# Altium PCB ESP32SSMB V1.4 .PcbDoc (part 2 of 2)
Units mm, origin at the board's own origin, x right, y up, seen from the top; angles counter-clockwise.
Board outline 43.94 x 35.18 mm, 2 copper layers (Top Layer, Bottom Layer), stack 1.671 mm thick; 77 components, 65 nets, 278 pads, 383 vias.
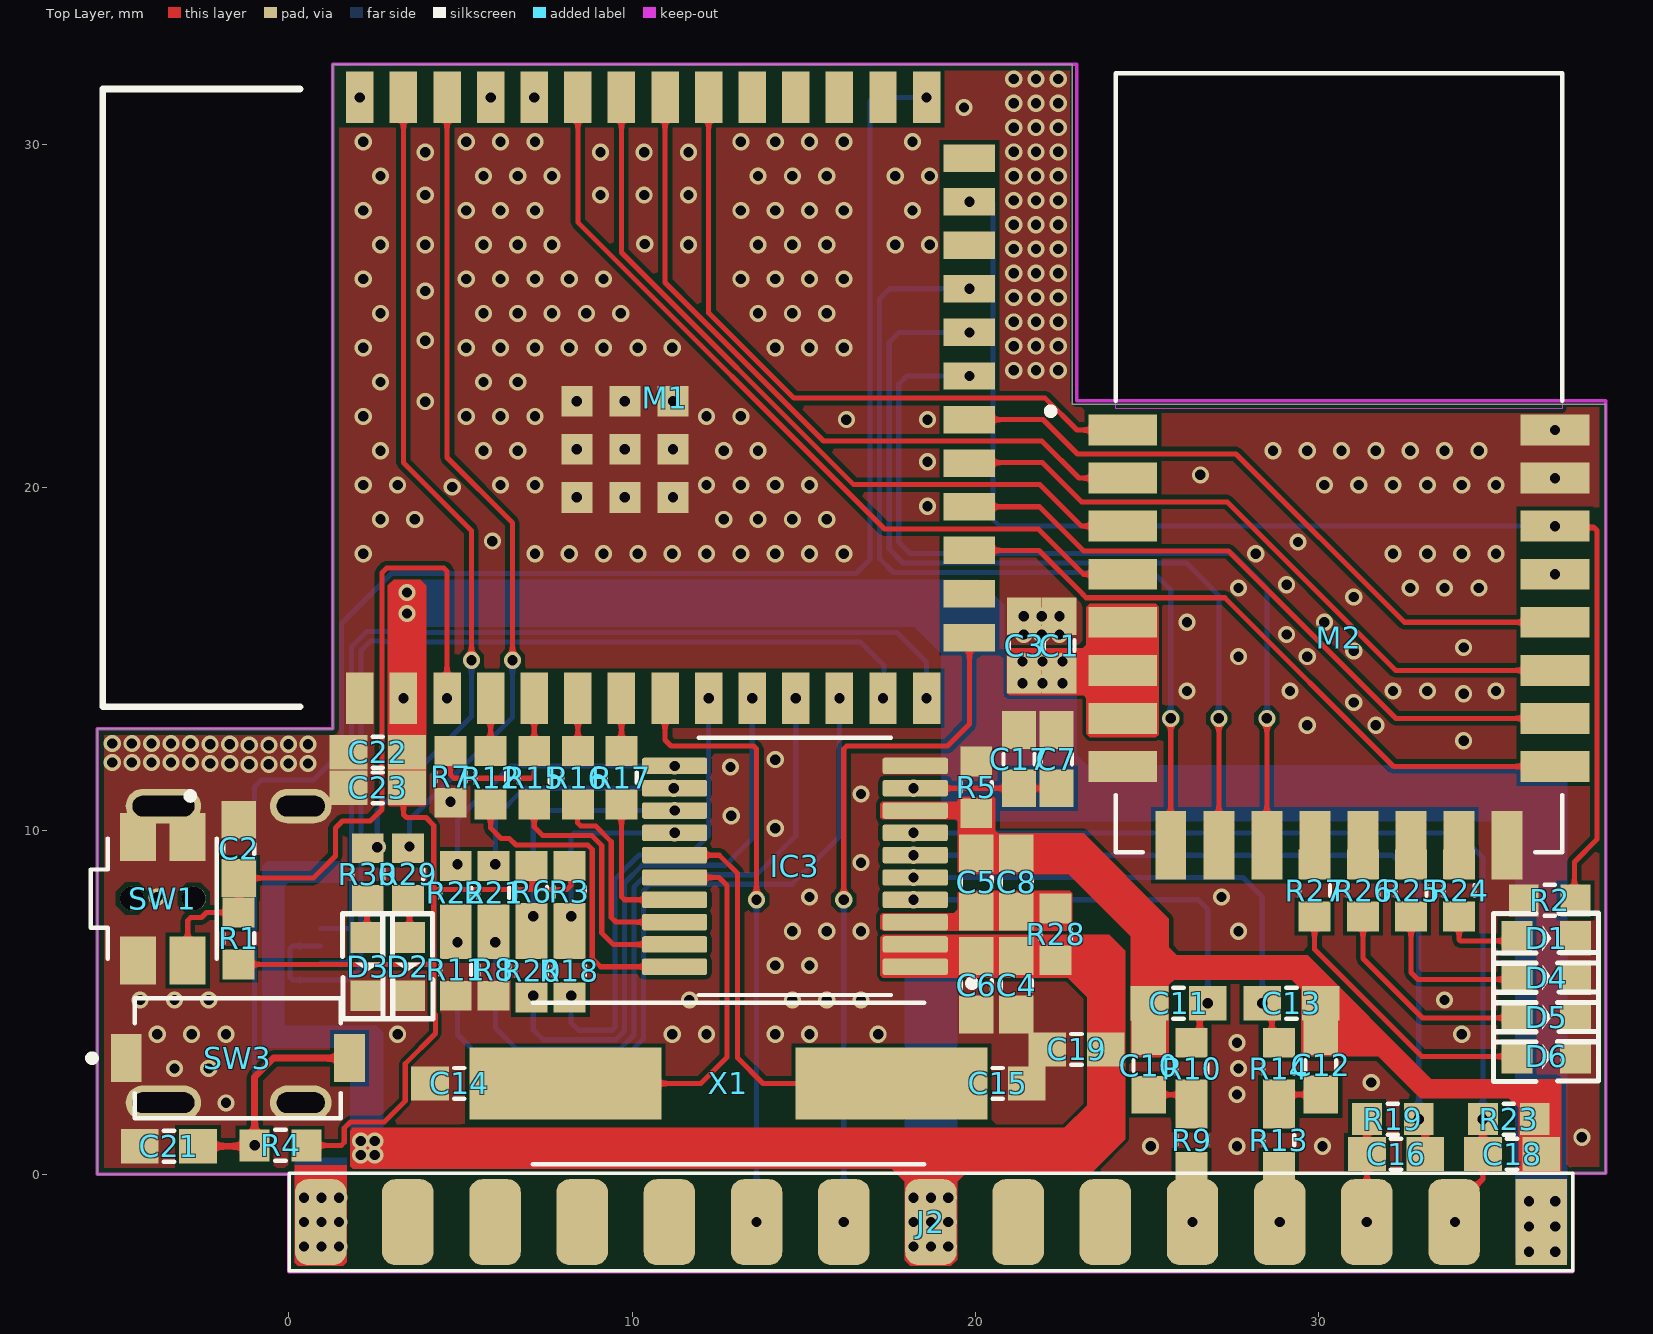
[diagram p0: Top Layer view]

## Via types
v1: diameter 0.5, hole 0.3, Top Layer to Bottom Layer, tented both sides, 383 vias

## Nets (pads, with @x,y where several pads share a name; then routed paths per layer and width w, separated by ;. In a path a pad name is that pad's centre, name@x,y a point inside that pad or via, vN(x,y) a via of type N, cw(c..) or ccw(c..) an arc to the next point about the centre after c; other vN are vias at no path point) (continued)
ADE-CF: (continued)
  Bottom Layer w0.15: v1(4.916,6.756) 4.916,4.064 5.62,3.36 9.756,3.36 10.338,3.942 10.338,8.255 10.526,8.443 14.654,8.443 16.041,9.83 v1(16.041,13.866)
ADE-I\Q\R\: IC3.14 R3.2 R18.1 | length 6.3
  Top Layer w0.15: R18.1 8.199,6.705 8.225,6.705 8.225,7.465 v1(8.225,7.516)
  Bottom Layer w0.15: v1(8.225,7.516) 8.225,9.853 8.313,9.941 v1(11.241,9.941)
ADE-MISO: M1.5 R7.2 R15.2 | length 5.5
  Top Layer w0.15: R7.2 4.712,11.633 4.814,11.532 7.06,11.532 7.148,11.619 7.148,12.327 R15.2 M1.5
ADE-MOSI: M1.4 R12.2 | length 1.5
  Top Layer w0.15: R12.2 M1.4
ADE-S\A\G\: IC3.13 R6.2 R20.1 | length 8
  Top Layer w0.15: R20.1 7.096,6.705 7.122,6.705 7.122,7.465 v1(7.122,7.516)
  Bottom Layer w0.15: v1(7.122,7.516) 7.122,10.503 7.21,10.591 v1(11.241,10.591)
ADE-SCLK: M1.6 R16.2 | length 1.5
  Top Layer w0.15: R16.2 M1.6
ADE-ZX: M1.11 R8.2 R21.2 | length 21.3
  Top Layer w0.15: R21.2 5.968,6.806 v1(6.019,6.756)
  Bottom Layer w0.15: v1(6.019,6.756) 6.019,4.256 6.638,3.637 9.641,3.637 10.061,4.057 10.061,7.532 10.061,8.37 10.411,8.72 11.249,8.72 13.636,8.72 14.771,9.855 v1(14.771,13.866)
AGND-ESP: C5.1 C8.1 C10.1 C11.1 C12.1 C13.1 C18.1 IC3.8 R5.1 R23.1
BOOT: C21.2 M1.27 R4.1 SW3.2 TP10.1 | length 55
  Top Layer w0.2: C21.2 -1.021,0.813 v1(-0.996,0.838) -0.996,2.826 -0.444,3.378 SW3.2
  Bottom Layer w0.15: v1(-0.996,0.838) -0.996,11.285 -0.799,11.481 0.717,11.481 1.535,12.299 1.535,16.044 2.989,17.498 16.521,17.498 16.937,17.914 16.937,31.278 17.025,31.366 v1(18.581,31.366)
CLK-IN: C15.1 IC3.15 X1.2 | length 12.2
  Top Layer w0.15: IC3.15 12.541,9.291 13.069,8.763 13.069,3.39 13.818,2.642 X1.2
CLK-OUT: C14.2 IC3.16 X1.1 | length 11.6
  Top Layer w0.15: X1.1 12.002,2.642 12.764,3.404 12.764,8.407 12.53,8.641 IC3.16
CUR-SHT-N-ESP: J2.07 J2.08 R13.1
  other v1: 28.868,-1.397
CUR-SHT-P-ESP: J2.09 J2.10 R9.1
  other v1: 26.328,-1.397
DN: J3.A7 J3.B7 M1.13 | length 29.8
  Bottom Layer w0.15: J3.A7 0.124,6.651 0.036,6.563 0.036,5.74 0.126,5.651 J3.B7 1.729,5.651 2.106,6.028 2.106,15.25 2.382,15.526 2.822,15.526 2.849,15.499 16.645,15.499 17.336,14.808 17.336,13.892 v1(17.311,13.866)
DP: J3.A6 J3.B6 M1.14 | length 29.2
  Bottom Layer w0.15: J3.B6 1.775,7.151 ; J3.A6@0.928,6.147 J3.A6 1.668,6.151 1.829,6.311 1.829,15.364 2.268,15.803 2.937,15.803 2.964,15.776 17.715,15.776 18.581,14.91 v1(18.581,13.866)
DWM3000-EXTON: M1.32 M2.1 | length 19.8
  Top Layer w0.15: M1.32 12.231,25.095 14.72,22.606 19.008,22.606 ; 19.008,22.606 20.653,22.606 22.035,22.606 22.965,21.676 M2.1
DWM3000-IO4: M1.21 M2.11 | length 25.5
  Top Layer w0.15: M2.11 v1(28.495,13.276)
  Bottom Layer w0.15: v1(19.831,23.251) 18.007,23.251 17.768,23.012 17.768,18.415 18.103,18.08 27.476,18.08 28.495,17.061 v1(28.495,13.276)
DWM3000-IO5: M1.22 M2.10 | length 25.9
  Top Layer w0.15: M2.10 v1(27.095,13.276)
  Bottom Layer w0.15: v1(19.831,24.521) 17.778,24.521 17.491,24.234 17.491,18.209 17.897,17.803 26.152,17.803 27.095,16.86 v1(27.095,13.276)
DWM3000-IO6: M1.23 M2.9 | length 26.6
  Top Layer w0.15: M2.9@25.693,9.584 v1@25.693,13.276
  Bottom Layer w0.15: v1(19.831,25.791) 17.499,25.791 17.214,25.506 17.214,17.928 17.616,17.526 25.185,17.526 25.695,17.016 v1(25.695,13.276)
DWM3000-IQR: M1.25 M2.22 R2.2 | length 38.7
  Top Layer w0.15: v1(36.89,18.876) 36.93,18.836 38.027,18.836 38.115,18.748 38.115,9.756 37.453,9.093 37.453,8.009 R2.2
  Bottom Layer w0.15: v1(19.831,28.331) 19.871,28.372 20.423,28.372 20.511,28.284 20.511,19.075 20.71,18.876 v1(36.89,18.876)
DWM3000-RSTn: M1.34 M2.3 | length 22.4
  Top Layer w0.15: M1.34 9.691,26.852 16.456,20.086 21.888,20.086 23.098,18.876 M2.3
DWM3000-SPI-CLK: M1.20 M2.20 | length 19.5
  Top Layer w0.15: M1.20 21.974,21.981 22.975,20.98 27.598,20.98 32.502,16.076 M2.20
DWM3000-SPI-CS: M1.17 M2.17 | length 19.7
  Top Layer w0.15: M1.17 21.856,18.171 23.144,16.883 23.144,16.877 23.232,16.789 27.268,16.789 32.181,11.876 M2.17
DWM3000-SPI-MISO: M1.19 M2.19 | length 19.6
  Top Layer w0.15: M1.19 19.846,20.726 21.959,20.726 23.102,19.583 27.338,19.583 32.245,14.676 M2.19
DWM3000-SPI-MOSI: M1.18 M2.18 | length 19.6
  Top Layer w0.15: M1.18 21.873,19.441 23.162,18.151 27.379,18.151 32.254,13.276 M2.18
DWM3000-SYNC: M1.35 M2.4 | length 23.8
  Top Layer w0.15: M1.35 8.421,27.73 17.355,18.796 19.008,18.796 ; 19.008,18.796 20.653,18.796 21.832,18.796 23.152,17.476 M2.4
DWM3000-WAKEUP: M1.33 M2.2 | length 21.1
  Top Layer w0.15: M1.33 10.961,25.973 15.578,21.356 21.939,21.356 23.019,20.276 M2.2
ESP-I\Q\R\: M1.9 R18.2 | length 13.8
  Bottom Layer w0.15: v1(8.225,5.196) 8.225,4.412 8.446,4.191 9.412,4.191 9.5,4.279 9.5,8.592 10.204,9.296 11.672,9.296 12.231,9.855 v1(12.231,13.866)
ESP-S\A\G\: M1.10 R20.2 | length 16.5
  Bottom Layer w0.15: v1(7.122,5.196) 7.122,4.203 7.41,3.914 9.526,3.914 9.784,4.171 9.784,7.646 9.784,8.484 10.297,8.997 11.135,8.997 12.719,8.997 13.501,9.779 v1(13.501,13.866)
GND-ESP: C1.1 C2.1 C3.1 C4.1 C6.1 C7.1 C14.1 C15.2 C17.1 C19.1 C21.1 C22.1 C23.1 D1.2 D2.2 D3.2 D4.2 D5.2 D6.2 IC1.1 IC3.10 J2.29 J2.30 J3.A1B12 J3.B1A12 J3.SHIELD M1.1 M1.40 M1.41 M1.42 M1.43 M1.44 M1.45 M1.46 M1.47 M1.48 M1.49 M2.8 M2.16 M2.21 M2.23 M2.24 R2.1 R5.2 R7.1 R8.1 R11.1 SW1.11 SW1.21 SW1.22 SW3.1 TP1.1
  other v1: 0.445,-2.108 0.953,-2.108 1.461,-2.108 0.445,-1.397 0.953,-1.397 1.461,-1.397 0.445,-0.686 0.953,-0.686 1.461,-0.686 25.109,0.813 27.623,0.813 30.112,0.813 37.67,1.075 -1.83,2.075 27.623,2.318 31.535,2.667 -3.33,3.075 -2.33,3.075 27.67,3.075 27.623,3.828 -3.83,4.075 -2.83,4.075 -1.83,4.075 3.17,4.075 11.17,4.075 12.17,4.075 14.17,4.075 15.17,4.075 17.17,4.075 34.17,4.075 -4.33,5.075 -3.33,5.075 -2.33,5.075 11.67,5.075 14.67,5.075 15.67,5.075 16.67,5.075 33.67,5.075 14.17,6.075 15.17,6.075 14.67,7.075 15.67,7.075 16.67,7.075 27.67,7.075 -3.83,8.075 15.17,8.075 27.17,8.075 16.67,9.075 14.17,10.075 12.891,10.439 4.712,10.846 16.67,11.075 12.866,11.862 -1.15,11.938 -0.58,11.938 -2.291,11.963 -1.721,11.963 -0.01,11.963 0.561,11.963 -5.143,11.989 -4.572,11.989 -4.002,11.989 -3.432,11.989 -2.861,11.989 14.17,12.075 -1.15,12.497 -0.58,12.497 -2.291,12.522 -1.721,12.522 -0.01,12.522 0.561,12.522 -5.143,12.548 -4.572,12.548 -4.002,12.548 -3.432,12.548 -2.861,12.548 34.227,12.624 29.67,13.075 31.67,13.075 31.027,13.741 34.227,13.995 26.17,14.075 29.17,14.075 32.17,14.075 33.17,14.075 35.17,14.075 27.67,15.075 29.67,15.075 31.027,15.24 34.227,15.342 21.413,15.723 21.934,15.723 22.454,15.723 29.071,15.723 26.17,16.075 30.17,16.075 21.413,16.256 21.934,16.256 22.454,16.256 31.027,16.815 27.67,17.075 32.67,17.075 33.67,17.075 34.67,17.075 29.071,17.17 36.89,17.476 2.17,18.075 7.17,18.075 8.17,18.075 9.17,18.075 10.17,18.075 11.17,18.075 12.17,18.075 13.17,18.075 14.17,18.075 15.17,18.075 16.17,18.075 28.17,18.075 32.17,18.075 33.17,18.075 34.17,18.075 35.17,18.075 29.401,18.415 5.932,18.44 2.67,19.075 3.67,19.075 12.67,19.075 13.67,19.075 14.67,19.075 15.67,19.075 18.606,19.456 8.391,19.716 9.791,19.716 11.191,19.716 4.763,20.015 2.17,20.075 3.17,20.075 6.17,20.075 7.17,20.075 12.17,20.075 13.17,20.075 14.17,20.075 15.17,20.075 30.17,20.075 31.17,20.075 32.17,20.075 33.17,20.075 34.17,20.075 35.17,20.075 36.89,20.276 26.556,20.371 18.606,20.752 2.67,21.075 5.67,21.075 6.67,21.075 12.67,21.075 13.67,21.075 28.67,21.075 29.67,21.075 30.67,21.075 31.67,21.075 32.67,21.075 33.67,21.075 34.67,21.075 8.391,21.116 9.791,21.116 11.191,21.116 36.89,21.676 16.244,21.981 18.606,21.981 2.17,22.075 5.17,22.075 6.17,22.075 7.17,22.075 12.17,22.075 13.17,22.075 3.976,22.504 8.391,22.516 9.791,22.516 11.191,22.516 2.67,23.075 5.67,23.075 6.67,23.075 21.121,23.415 21.769,23.415 22.416,23.415 2.17,24.075 5.17,24.075 6.17,24.075 7.17,24.075 8.17,24.075 9.17,24.075 10.17,24.075 11.17,24.075 14.17,24.075 15.17,24.075 16.17,24.075 21.121,24.122 21.769,24.122 22.416,24.122 3.976,24.282 21.121,24.829 21.769,24.829 22.416,24.829 2.67,25.075 5.67,25.075 6.67,25.075 7.67,25.075 8.67,25.075 9.67,25.075 13.67,25.075 14.67,25.075 15.67,25.075 21.121,25.537 21.769,25.537 22.416,25.537 3.976,25.73 2.17,26.075 5.17,26.075 6.17,26.075 7.17,26.075 8.17,26.075 9.17,26.075 13.17,26.075 14.17,26.075 15.17,26.075 16.17,26.075 21.121,26.244 21.769,26.244 22.416,26.244 21.121,26.951 21.769,26.951 22.416,26.951 2.67,27.075 3.976,27.076 5.67,27.075 6.67,27.075 7.67,27.075 11.647,27.076 13.67,27.075 14.67,27.075 15.67,27.075 17.67,27.075 18.67,27.075 10.371,27.096 21.121,27.659 21.769,27.659 22.416,27.659 2.17,28.075 5.17,28.075 6.17,28.075 7.17,28.075 13.17,28.075 14.17,28.075 15.17,28.075 16.17,28.075 18.17,28.075 21.121,28.366 21.769,28.366 22.416,28.366 3.976,28.524 9.081,28.524 10.351,28.524 11.647,28.524 2.67,29.075 5.67,29.075 6.67,29.075 7.67,29.075 13.67,29.075 14.67,29.075 15.67,29.075 17.67,29.075 18.67,29.075 21.121,29.073 21.769,29.073 22.416,29.073 3.976,29.769 9.081,29.769 10.351,29.769 11.647,29.769 21.121,29.781 21.769,29.781 22.416,29.781 2.17,30.075 5.17,30.075 6.17,30.075 7.17,30.075 13.17,30.075 14.17,30.075 15.17,30.075 16.17,30.075 18.17,30.075 21.121,30.488 21.769,30.488 22.416,30.488 19.67,31.075 21.121,31.195 21.769,31.195 22.416,31.195 2.071,31.366 21.121,31.902 21.769,31.902 22.416,31.902
LEAK_INT: J2.17 J2.18 M1.15 | length 20.3
  Top Layer w0.15: v1(16.168,7.991) 16.168,12.384 16.256,12.471 19.19,12.471 19.831,13.112 M1.15
  Bottom Layer w0.15: v1(16.168,-1.397) v1(16.168,7.991)
NetC5_2: C5.2 C8.2 IC3.3 R28.1
NetC7_2: C7.2 C17.2 IC3.9 TP11.1 | length 4.2
  Top Layer w0.15: v1(18.2,11.241) IC3.9 C17.2 C7.2
NetC10_2: C10.2 R9.2 R10.1 | length 1.2
  Top Layer w0.15: C10.2 26.297,2.313 R10.1
NetC11_2: C11.2 IC3.4 R10.2 TP6.1 | length 12.7
  Top Layer w0.15: R10.2@26.537,4.063 C11.2@26.537,4.744
  Top Layer w0.4: R10.2 R10.2@26.537,4.063 ; C11.2@26.537,4.744 C11.2@26.753,4.96
  Bottom Layer w0.15: v1(18.2,7.991) 26.49,7.991 26.771,7.71 v1(26.771,4.978)
NetC12_2: C12.2 R13.2 R14.1 | length 1.2
  Top Layer w0.15: R14.1 C12.2
NetC13_2: C13.2 IC3.5 R14.2 TP7.1 | length 14.8
  Top Layer w0.15: C13.2@28.373,4.967 28.639,4.701 28.639,4.032 R14.2
  Bottom Layer w0.15: v1(18.2,8.641) 27.796,8.641 28.362,8.075 v1(28.362,4.978)
NetC16_2: C16.2 IC3.6 R19.2 TP8.1 | length 23
  Top Layer w0.15: R19.2@32.932,1.575 33.108,1.399 C16.2
  Bottom Layer w0.15: v1(18.2,9.291) 32.15,9.291 32.918,8.523 v1(32.918,1.6)
NetD1_1: D1.1 R24.2 | length 2.4
  Top Layer w0.15: R24.2 34.095,6.837 34.137,6.795 D1.1@35.787,6.795
NetD2_1: D2.1 R29.2 | length 1.2
  Top Layer w0.15: D2.1 3.493,6.895 3.519,6.895 3.519,7.983 3.493,7.983 R29.2
NetD3_1: D3.1 R30.2 | length 1.1
  Top Layer w0.15: D3.1 2.274,6.92 2.274,7.957 R30.2
NetD4_1: D4.1 R25.2 | length 4.8
  Top Layer w0.15: R25.2 32.695,5.876 32.898,5.673 D4.1@35.787,5.673
NetD5_1: D5.1 R26.2 | length 6.4
  Top Layer w0.15: R26.2 31.295,6.285 33.029,4.551 D5.1@35.787,4.551
NetD6_1: D6.1 R27.2 | length 8.2
  Top Layer w0.15: R27.2 29.884,6.55 33.005,3.429 D6.1
NetIC3_11: IC3.11 R22.1 | length 8.3
  Bottom Layer w0.15: v1(4.916,9.026) 4.916,10.333 6.474,11.891 v1(11.241,11.891)
NetIC3_12: IC3.12 R21.1 | length 6.9
  Bottom Layer w0.15: v1(6.019,9.026) 6.019,10.399 6.86,11.241 v1(11.215,11.241)
NetIC3_17: IC3.17 R17.1 | length 4.3
  Top Layer w0.15: R17.1 9.691,8.079 9.779,7.991 IC3.17
NetIC3_18: IC3.18 R16.1 | length 5.9
  Top Layer w0.15: R16.1 8.407,10.756 8.407,10.236 8.504,10.139 8.941,10.139 9.395,9.685 9.395,7.48 9.534,7.341 IC3.18
NetIC3_19: IC3.19 R15.1 | length 7.7
  Top Layer w0.15: R15.1 7.151,10.11 7.398,9.862 8.826,9.862 9.118,9.571 9.118,7.028 9.455,6.691 IC3.19
NetIC3_20: IC3.20 R12.1 | length 9.6
  Top Layer w0.15: R12.1 5.881,10.08 6.18,9.781 6.424,9.781 6.62,9.585 8.427,9.585 8.712,9.585 8.841,9.456 8.841,6.285 9.085,6.041 IC3.20
NetM1_38: M1.38 R29.1 | length 23.9
  Top Layer w0.15: M1.38 4.611,20.879 6.516,18.974 v1(6.516,14.97)
  Bottom Layer w0.15: v1(3.519,9.543) 3.519,10.312 6.516,13.31 v1(6.516,14.97)
NetM1_39: M1.39 R30.1 | length 23.8
  Top Layer w0.15: M1.39 3.341,20.726 5.322,18.745 v1(5.322,14.97)
  Bottom Layer w0.15: v1(2.579,9.525) 2.579,10.592 5.322,13.335 v1(5.322,14.97)
NetM2_12: M2.12 R27.1
NetM2_13: M2.13 R26.1
NetM2_14: M2.14 R25.1
NetM2_15: M2.15 R24.1
POWER_L_D: C16.1 J2.05 J2.06 R19.1 | length 3
  Top Layer w0.15: v1(31.408,-1.397) C16.1 R19.1
POWER_N_D: C18.2 IC3.7 J2.03 J2.04 R23.2 TP9.1 | length 27.9
  Top Layer w0.15: J2.03 33.948,-0.981 34.788,-0.141 C18.2 34.788,1.598 R23.2@34.786,1.6
  Bottom Layer w0.15: v1(18.2,9.941) 34.065,9.941 34.786,9.22 TP9.1
  other v1: 33.973,-1.397 34.788,1.6
RELAY: J2.19 J2.20 M1.8 | length 17.9
  Top Layer w0.15: M1.8 10.961,12.649 11.139,12.471 13.54,12.471 13.628,12.384 v1(13.628,7.991)
  Bottom Layer w0.15: v1(13.628,-1.397) v1(13.628,7.991) v1@13.628,8.074
RESET: C2.2 M1.3 R1.1 SW1.12 TP12.1 | length 21.8
  Top Layer w0.15: SW1.12 -2.945,7.387 -2.857,7.474 -2.541,7.474 -2.394,7.622 R1.1 C2.2 0.713,8.624 1.36,9.271 1.36,10.084 1.563,10.287 2.376,10.287 2.712,10.623 2.712,17.52 2.845,17.653 4.523,17.653 4.611,17.565 v1(4.611,13.866)
RXD0: M1.36 TP3.1
  other v1: 7.151,31.366
TXD0: M1.37 TP2.1
  other v1: 5.881,31.366
pads on no net: IC1.2 J2.11 J2.12 J2.13 J2.14 J2.21 J2.22 J2.23 J2.24 J2.25 J2.26 J2.27 J2.28 J3.A5 J3.A8 J3.B5 J3.B8 M1.16 M1.24 M1.26 M1.28 M1.29 M1.30 M1.31 SW1.

## Polygon pours and split planes (outlines as drawn)
GND-ESP on Top Layer "GND-ESP_L01_P000" (solid, remove dead copper, pour order 0): -5.575,0 0.013,0 0.013,-2.845 37.402,-2.845 37.402,0.025 38.367,0.025 38.367,22.432 22.823,22.432 22.823,32.334 1.283,32.334 1.283,12.979 -5.575,12.979
GND-ESP on Bottom Layer "GND-ESP_L02_P001" (solid, remove dead copper, pour order 1): -5.574,0 0.014,0 0.014,-2.845 37.402,-2.845 37.402,0.025 38.368,0.025 38.368,22.432 22.823,22.432 22.823,32.334 1.284,32.334 1.284,12.979 -5.574,12.979

## Keep-outs
Keep-Out Layer:
  lines w0.1: -5.575,0 0,0 0,-2.845 37.402,-2.845 37.402,0.025 38.367,0.025 38.367,22.53 22.95,22.53 22.95,32.334 1.283,32.334 1.283,12.979 -5.575,12.979 -5.575,0

## Other copper
Top Layer:
  region net AGND-ESP: 17.285,10.338 17.235,10.389 17.235,10.795 17.285,10.846 19.444,10.846 19.495,10.897 19.495,10.947 19.546,10.998 20.537,10.998 20.587,10.947 20.587,10.008 20.664,9.931 21.781,9.931 23.153,9.931 25.642,7.442 25.642,6.604 25.871,6.375 29.681,6.375 33.287,2.769 36.919,2.769 37.072,2.616 37.072,0.102 37.021,0.051 35.878,0.051 35.827,0.102 35.827,1.93 35.548,2.21 32.957,2.21 31.738,3.429 29.604,3.429 29.503,3.531 29.503,5.385 29.223,5.664 25.794,5.664 25.642,5.512 25.642,3.48 25.566,3.404 24.601,3.404 24.524,3.48 24.524,6.934 22.721,8.738 19.571,8.738 19.495,8.814 19.495,10.287 19.444,10.338
  region net NetC5_2: 17.235,7.151 17.235,7.544 17.287,7.596 19.37,7.596 19.495,7.722 19.495,8.204 19.546,8.255 22.746,8.255 22.823,8.179 22.823,7.163 22.746,7.087 17.299,7.087
  region net 3V3-ESP: 2.922,10.719 3.95,10.719 4.001,10.77 4.001,17.145 3.824,17.323 3.061,17.323 2.887,17.148 2.887,10.754
  pour cut-out: 35.763,11.326 35.763,19.426 38.266,19.426 38.266,11.326
  pour cut-out: 25.145,8.454 34.645,8.454 34.645,10.708 25.145,10.708
  pour cut-out: 19.081,12.989 2.757,12.989 2.757,14.743 19.081,14.743
  pour cut-out: 18.954,30.101 20.708,30.101 20.708,15.131 18.954,15.131
  pour cut-out: 1.392,32.226 1.392,30.489 19.081,30.489 19.081,32.226
  region net GND-ESP: 0.178,-2.577 0.267,-2.667 1.588,-2.667 1.69,-2.565 1.69,0.254 0.178,0.254
  region net 3V3-ESP: 20.918,14.021 20.994,13.945 23.153,13.945 23.229,13.868 23.229,12.827 23.331,12.725 25.261,12.725 25.337,12.802 25.337,16.535 25.261,16.612 23.331,16.612 23.229,16.51 23.229,15.418 23.127,15.316 21.019,15.316 20.918,15.215
  region net 5V-ESP: 1.791,0.226 1.866,0.152 17.565,0.152 17.946,-0.229 17.946,-2.515 18.098,-2.667 19.292,-2.667 19.47,-2.489 19.47,-0.229 19.724,0.025 23.381,0.025 24.372,1.016 24.372,6.502 23.902,6.973 17.305,6.973 17.235,6.903 17.235,5.791 17.311,5.715 22.696,5.715 23.254,5.156 23.254,2.007 22.594,1.346 1.868,1.346 1.791,1.27
Bottom Layer:
  region net 5V-ESP: 1.868,0.152 2.706,0.152 2.757,0.203 2.757,4.115 2.553,4.318 -0.088,4.318 -0.139,4.369 -0.139,8.357 -0.012,8.484 1.487,8.484 1.512,8.509 1.512,9.093 1.487,9.119 -0.622,9.119 -0.774,8.966 -0.774,3.759 -0.698,3.683 1.741,3.683 1.791,3.632 1.791,0.229
  region net GND-ESP: 0.178,-2.577 0.267,-2.667 1.588,-2.667 1.69,-2.565 1.69,0.483 0.178,0.483
  region net 3V3-ESP: 35.929,-2.642 37.072,-2.642 37.25,-2.464 37.25,11.709 37.047,11.913 23.255,11.913 22.95,12.217 22.95,15.113 22.746,15.316 20.994,15.316 20.841,15.469 20.841,16.586 20.105,17.323 3.061,17.323 2.884,17.145 2.884,16.104 3.036,15.951 18.225,15.951 19.01,15.167 19.014,10.718 19.444,10.287 35.345,10.287 35.726,9.906 35.726,-2.438
  region net 5V-ESP: 18.098,-2.667 19.292,-2.667 19.47,-2.489 19.47,6.121 19.114,6.477 18.276,6.477 17.946,6.147 17.946,-2.515

## Silkscreen, mask and mechanical layers (free items; w line width, h text height)
Bottom Overlay:
  drawing of 30 lines, arcs and shapes, not listed
  text "TX0" at 5.511,28.981 h1 r270
  text "RX0" at 6.806,28.931 h1 r270
  text "GND" at 34.253,17.794 h1 r180
  text "RESET" at 4.292,14.605 h1 r270
  text "3V3" at 3.022,14.58 h1 r270
  text "VREF" at 15.127,11.582 h1 r180
  text "V1P" at 27.141,4.342 h1 r90
  text "V1N" at 28.69,4.342 h1 r90
  text "V2P" at 34.43,2.262 h1 r270
  text "V2N" at 32.652,2.211 h1 r270
  text "BOOT" at -0.342,1.157 h1 r180